# Altium PCB REIS_PCB.PcbDoc
Units mm, origin at the board's own origin, x right, y up, seen from the top; angles counter-clockwise.
Board outline 74.05 x 42.5 mm, 2 copper layers (Top Layer, Bottom Layer); 30 components, 27 nets, 173 pads, 6 vias.
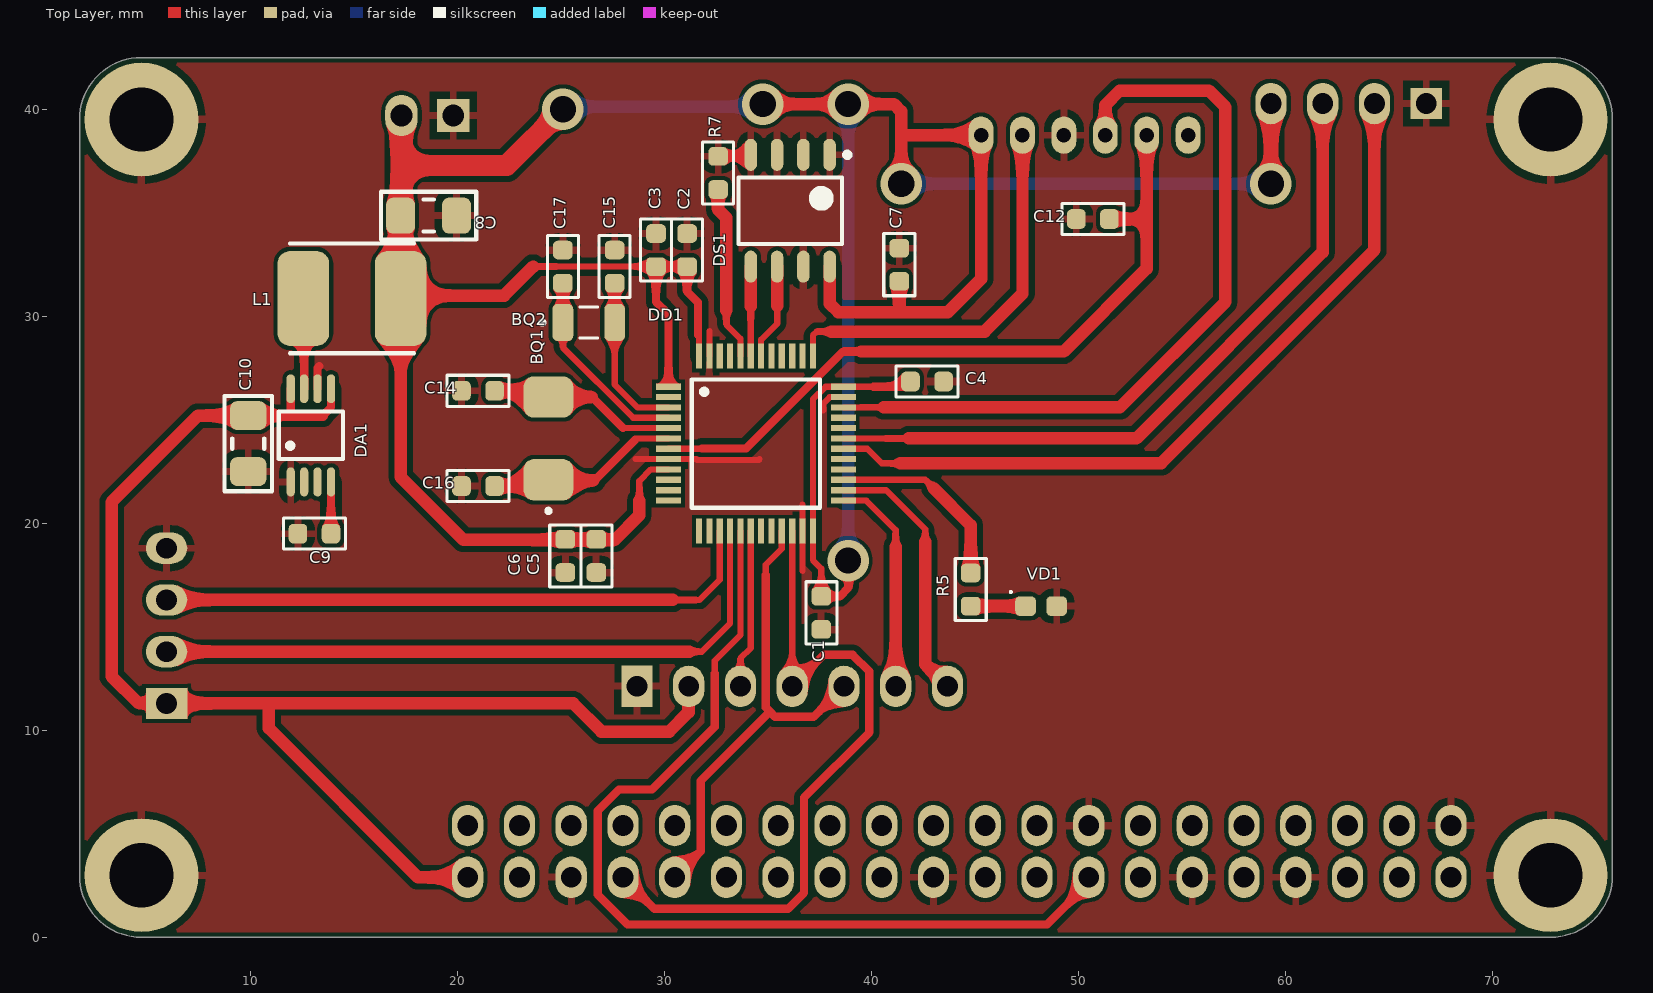
[diagram p0: Top Layer view]
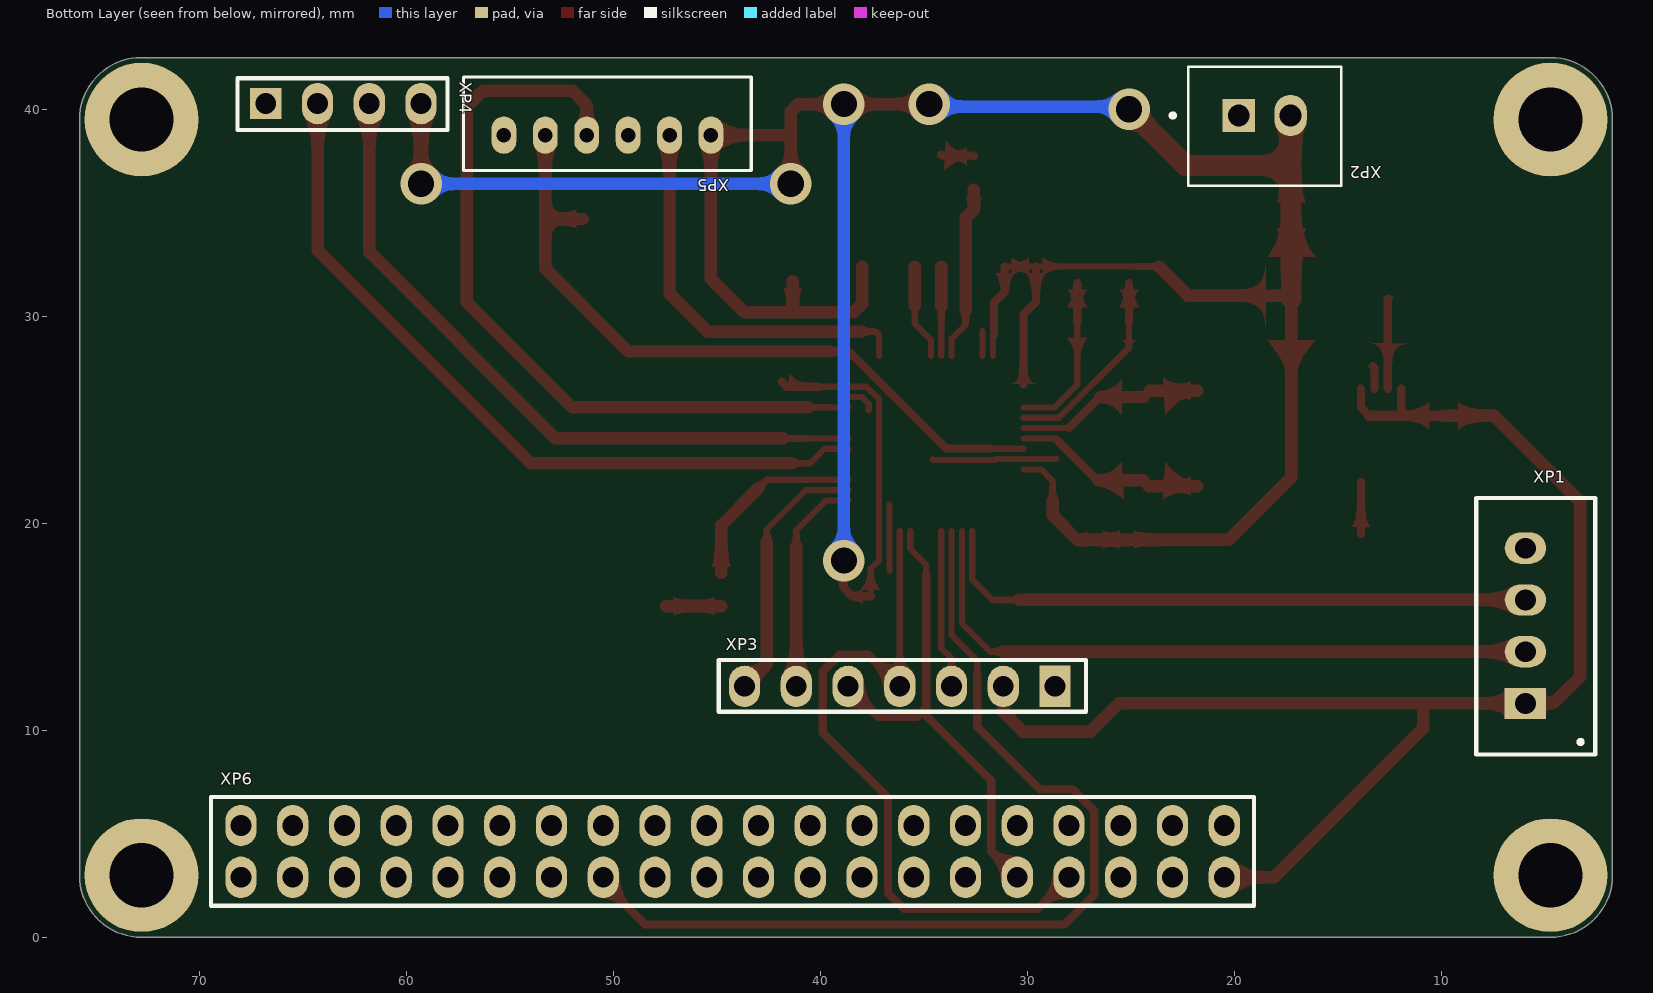
[diagram p1: Bottom Layer view, seen from below]

## Layer stack, top to bottom
Top Solder: solder mask 0.0102, Solder Resist, Dk 3.5
Top Layer: signal copper 0.0356
Dielectric 1: dielectric 0.32, FR-4, Dk 4.8
Bottom Layer: signal copper 0.0356
Bottom Solder: solder mask 0.0102, Solder Resist, Dk 3.5

## Board outline
1.75,3 1.75,39.5 cw(c4.75,39.5) 4.75,42.5 72.8,42.5 cw(c72.8,39.5) 75.8,39.5 75.8,3 cw(c72.8,3) 72.8,0 4.75,0 cw(c4.75,3)

## Design rules (kind name [scope] priority, off if disabled: settings)
AcuteAngle [All] p1: minimum=3.50000000000000E+0001 checktracksonly=FALSE
BoardOutlineClearance "BoardOutlineClearance 1" [All] p1: gap=0.25 ignorepadtopadclearanceinfootprint=FALSE except(0: Arc-SplitContinuation Track-SplitContinuation SMDPad-SplitContinuation THPad-SplitContinuation Via-SplitContinuation Fill-SplitContinuation Poly-SplitContinuation Region-SplitContinuation Text-SplitContinuation) // Milling
BoardOutlineClearance "BoardOutlineClearance 2" [All] p2: gap=0.4 ignorepadtopadclearanceinfootprint=FALSE except(0: Arc-SplitContinuation Track-SplitContinuation SMDPad-SplitContinuation THPad-SplitContinuation Via-SplitContinuation Fill-SplitContinuation Poly-SplitContinuation Region-SplitContinuation Text-SplitContinuation) // V-Cut
Clearance "Clearance 3 Oz" [All] p1 off: gap=0.35 ignorepadtopadclearanceinfootprint=FALSE except(0.25: Arc-Hole Track-Hole SMDPad-Hole THPad-Hole Via-Hole Fill-Hole Poly-Hole Region-Hole Text-Hole)
Clearance "Clearance 2 Oz" [All] p2 off: gap=0.3 ignorepadtopadclearanceinfootprint=TRUE except(0.25: Arc-Hole Track-Hole SMDPad-Hole THPad-Hole Via-Hole Fill-Hole Poly-Hole Region-Hole Text-Hole)
Clearance "Clearance-1 1 Oz" [All] p3: gap=0.2 ignorepadtopadclearanceinfootprint=TRUE except(0.25: Arc-Hole Track-Hole SMDPad-Hole THPad-Hole Via-Hole Fill-Hole Poly-Hole Region-Hole Text-Hole; 0.3: Arc-Fill Arc-Poly Arc-Region Track-Fill Track-Poly Track-Region) // Standart
Clearance "Clearance-2 1 Oz" [All] p4 off: gap=0.15 ignorepadtopadclearanceinfootprint=FALSE except(0.2: Arc-Fill Arc-Poly Track-Fill Track-Poly SMDPad-Fill SMDPad-Poly THPad-Fill THPad-Poly Via-Fill Via-Poly Fill-Fill Fill-Poly Poly-Poly; 0.25: Arc-Hole Track-Hole SMDPad-Hole THPad-Hole Via-Hole Fill-Hole Poly-Hole Region-Hole Text-Hole) // Advance
Clearance "Clearance-1 1/2 Oz" [All] p5 off: gap=0.125 ignorepadtopadclearanceinfootprint=FALSE except(0.2: Arc-Fill Arc-Poly Track-Fill Track-Poly SMDPad-SMDPad SMDPad-Fill SMDPad-Poly THPad-Fill THPad-Poly Via-Fill Via-Poly Fill-Fill Fill-Poly Poly-Poly Poly-Region Poly-Text; 0.25: Arc-Hole Track-Hole SMDPad-Hole THPad-Hole Via-Hole Fill-Hole Poly-Hole Region-Hole Text-Hole) // Standart
Clearance "Clearance-2 1/2 Oz" [All] p6 off: gap=0.1 ignorepadtopadclearanceinfootprint=FALSE except(0.15: Arc-Fill Arc-Poly Track-Fill Track-Poly SMDPad-SMDPad SMDPad-Fill SMDPad-Poly THPad-Fill THPad-Poly Via-Fill Via-Poly Fill-Fill Fill-Poly Poly-Poly Poly-Region Poly-Text; 0.25: Arc-Hole Track-Hole SMDPad-Hole THPad-Hole Via-Hole Fill-Hole Poly-Hole Region-Hole Text-Hole) // Advance
DiffPairsRouting "DiffPairsRouting 1 Oz" [All] p1: maxlimit=0.254 minlimit=0.2 mostfreqgap=0.254 toplayer_minwidth=0.2 toplayer_maxwidth=0.381 toplayer_prefwidth=0.381 bottomlayer_minwidth=0.2 bottomlayer_maxwidth=0.381 bottomlayer_prefwidth=0.381 maxuncoupledlength=12.7
DiffPairsRouting "DiffPairsRouting 1/2 Oz" [All] p2: maxlimit=0.254 minlimit=0.1 mostfreqgap=0.254 toplayer_minwidth=0.1 toplayer_maxwidth=0.381 toplayer_prefwidth=0.381 bottomlayer_minwidth=0.1 bottomlayer_maxwidth=0.381 bottomlayer_prefwidth=0.381 maxuncoupledlength=12.7
HoleSize "Minimum HoleSize" [IsPad] p1: absolutevalues=TRUE maxlimit=5.9 minlimit=0.6 maxpercent=80.000 minpercent=20.000
HoleSize "Minimum HoleSize VIA 1" [IsVia] p2: absolutevalues=TRUE maxlimit=5.9 minlimit=0.3 maxpercent=80.000 minpercent=20.000 // Standart
HoleSize "Minimum HoleSize VIA 2" [IsVia] p3: absolutevalues=TRUE maxlimit=5.9 minlimit=0.2 maxpercent=80.000 minpercent=20.000 // Advance
HoleToHoleClearance Hole2HoleClearance [All] p1: gap=0.25 allowstackedmicrovias=FALSE
MinimumAnnularRing "Minimum AR VIA Standart" [IsVia] p1: minimumring=0.15
MinimumAnnularRing "Minimum AR PAD Standart" [IsPAD] p2: minimumring=0.2
MinimumAnnularRing "Minimum AR VIA Advance" [IsVia] p3: minimumring=0.1
MinimumAnnularRing "Minimum AR PAD Advance" [IsPAD] p4: minimumring=0.15
MinimumSolderMaskSliver "SolderMask Bridge Standart" [All] p1 off: minsoldermaskwidth=0.15 // All Masks
MinimumSolderMaskSliver "SolderMask Bridge Advance" [All] p2: minsoldermaskwidth=0.1 // Mask LDI
PlaneClearance "PlaneClearance 3 Oz" [All] p1: clearance=0.35
PlaneClearance "PlaneClearance 2 Oz" [All] p2: clearance=0.3
PlaneClearance "PlaneClearance 1 Oz" [All] p3: clearance=0.2
PlaneClearance "PlaneClearance-1 1/2 Oz" [All] p4: clearance=0.2 // Standart
PlaneClearance "PlaneClearance-2 1/2 Oz" [All] p5: clearance=0.15 // Advance
PlaneConnect "TermalConnect 3 Oz" [All] p1: planeconnectstyle=Relief reliefexpansion=0.2 reliefentries=4 reliefconductorwidth=0.35 reliefairgap=0.35 // Standart
PlaneConnect "TermalConnect 2 Oz" [All] p2: planeconnectstyle=Relief reliefexpansion=0.2 reliefentries=4 reliefconductorwidth=0.3 reliefairgap=0.3 // Standart
PlaneConnect "TermalConnect-1 1 Oz" [All] p3: planeconnectstyle=Relief reliefexpansion=0.2 reliefentries=4 reliefconductorwidth=0.2 reliefairgap=0.2 // Standart
PlaneConnect "TermalConnect-2 1 Oz" [All] p4: pad.planeconnectstyle=Relief pad.reliefexpansion=0.15 pad.reliefentries=4 pad.reliefconductorwidth=0.2 pad.reliefairgap=0.2 via.planeconnectstyle=Direct via.reliefexpansion=0.15 via.reliefentries=4 via.reliefconductorwidth=0.15 via.reliefairgap=0.15 // Advance
PlaneConnect "TermalConnect-1 1/2 Oz" [All] p5: planeconnectstyle=Relief reliefexpansion=0.2 reliefentries=4 reliefconductorwidth=0.2 reliefairgap=0.2 // Standart
PlaneConnect "TermalConnect-2 1/2 Oz" [All] p6: pad.planeconnectstyle=Relief pad.reliefexpansion=0.15 pad.reliefentries=4 pad.reliefconductorwidth=0.15 pad.reliefairgap=0.15 via.planeconnectstyle=Direct via.reliefexpansion=0.15 via.reliefentries=4 via.reliefconductorwidth=0.15 via.reliefairgap=0.15 // Advance
PolygonConnect "PolygonConnect 3 Oz" [All] p1: thpad.connectstyle=Relief thpad.reliefconductorwidth=0.35 thpad.reliefentries=4 thpad.polygonreliefangle="90 Angle" thpad.airgapwidth=0.35 smdpad.connectstyle=Relief smdpad.reliefconductorwidth=0.35 smdpad.reliefentries=4 smdpad.polygonreliefangle="90 Angle" smdpad.airgapwidth=0.35 via.connectstyle=Direct via.reliefconductorwidth=0.254 via.reliefentries=4 via.polygonreliefangle="90 Angle" via.airgapwidth=0.254
PolygonConnect "PolygonConnect 2 Oz" [All] p2: thpad.connectstyle=Relief thpad.reliefconductorwidth=0.3 thpad.reliefentries=4 thpad.polygonreliefangle="90 Angle" thpad.airgapwidth=0.3 smdpad.connectstyle=Relief smdpad.reliefconductorwidth=0.3 smdpad.reliefentries=4 smdpad.polygonreliefangle="90 Angle" smdpad.airgapwidth=0.3 via.connectstyle=Direct via.reliefconductorwidth=0.254 via.reliefentries=4 via.polygonreliefangle="90 Angle" via.airgapwidth=0.254
PolygonConnect "PolygonConnect-1 1 Oz" [All] p3: thpad.connectstyle=Relief thpad.reliefconductorwidth=0.2 thpad.reliefentries=4 thpad.polygonreliefangle="90 Angle" thpad.airgapwidth=0.2 smdpad.connectstyle=Relief smdpad.reliefconductorwidth=0.2 smdpad.reliefentries=4 smdpad.polygonreliefangle="90 Angle" smdpad.airgapwidth=0.2 via.connectstyle=Direct via.reliefconductorwidth=0.254 via.reliefentries=4 via.polygonreliefangle="90 Angle" via.airgapwidth=0.254 // Standart
PolygonConnect "PolygonConnect-2 1 Oz" [All] p4: thpad.connectstyle=Relief thpad.reliefconductorwidth=0.15 thpad.reliefentries=4 thpad.polygonreliefangle="90 Angle" thpad.airgapwidth=0.15 smdpad.connectstyle=Relief smdpad.reliefconductorwidth=0.15 smdpad.reliefentries=4 smdpad.polygonreliefangle="90 Angle" smdpad.airgapwidth=0.15 via.connectstyle=Direct via.reliefconductorwidth=0.254 via.reliefentries=4 via.polygonreliefangle="90 Angle" via.airgapwidth=0.254 // Advance
PolygonConnect "PolygonConnect-1 1/2 Oz" [All] p5: thpad.connectstyle=Relief thpad.reliefconductorwidth=0.15 thpad.reliefentries=4 thpad.polygonreliefangle="90 Angle" thpad.airgapwidth=0.2 smdpad.connectstyle=Relief smdpad.reliefconductorwidth=0.2 smdpad.reliefentries=4 smdpad.polygonreliefangle="90 Angle" smdpad.airgapwidth=0.2 via.connectstyle=Direct via.reliefconductorwidth=0.254 via.reliefentries=4 via.polygonreliefangle="90 Angle" via.airgapwidth=0.254 // Standart
PolygonConnect "PolygonConnect-2 1/2 Oz" [All] p6: thpad.connectstyle=Relief thpad.reliefconductorwidth=0.125 thpad.reliefentries=4 thpad.polygonreliefangle="90 Angle" thpad.airgapwidth=0.15 smdpad.connectstyle=Relief smdpad.reliefconductorwidth=0.125 smdpad.reliefentries=4 smdpad.polygonreliefangle="90 Angle" smdpad.airgapwidth=0.15 via.connectstyle=Direct via.reliefconductorwidth=0.254 via.reliefentries=4 via.polygonreliefangle="90 Angle" via.airgapwidth=0.254 // Advance
RoutingCorners [All] p1 off: cornerstyle=45-Degree minsetback=2.54 maxsetback=2.54
RoutingVias [All] p1: holewidth=0.3 width=0.6 viastyle="Through Hole" minholewidth=0.2 minwidth=0.4 maxholewidth=5.9 maxwidth=6.4
SilkToSilkClearance Silk2SilkClearance [All] p1 off: silktosilkclearance=0.15
SilkToSolderMaskClearance Silk2SolderMaskClearance [IsPad] p1 off: minsilkscreentomaskgap=0.15 clearancetoexposedcopper=TRUE
SolderMaskExpansion SolderMaskExpansion-1 [All] p1: expansion=0.05 istentingtop=FALSE // Standart
SolderMaskExpansion "SolderMaskExpansion LDI" [All] p2: expansion=0.025 istentingtop=FALSE // Advance
UnRoutedNet [All] p1: checkbadconnections=TRUE
Width "Width 3 Oz" [All] p1 off: maxlimit=10 minlimit=0.35 preferedwidth=0.4 checkconnectedcopper=TRUE
Width "Width 2 Oz" [All] p2: maxlimit=1 minlimit=0.2 preferedwidth=0.3 minimp=50.000000 maximp=50.000000 favimp=50.000000 checkconnectedcopper=TRUE
Width "Width 1 Oz" [All] p3 off: maxlimit=10 minlimit=0.15 preferedwidth=0.2 checkconnectedcopper=TRUE
Width "Width 1/2 Oz" [All] p4 off: maxlimit=10 minlimit=0.1 preferedwidth=0.125 checkconnectedcopper=TRUE
20 further rules are at their usual default settings.

## Classes and differential pairs
component class REIS_PCB: BQ1 BQ2 C1 C2 C3 C4 C5 C6 C7 C8 C9 C10 C12 C14 C15 C16 C17 DA1 DD1 DS1 L1 R7 XP1 XP2 XP3 XP4 XP5 XP6

## Components (designator, comment, footprint, x,y, rotation, side; value= is the part's Value field where it differs from the comment)
BQ1 "NX5032GA-8MHz" NX5032GA-8MHz 24.4,24.1 r90 top
BQ2 "NX3215SA-32.768K" NX3215SA-32.768kHz 26.35,29.7 r0 top
C1 "GRM188R71H104JA93D" 0603 37.584,15.675 r90 top
C2 "GRM188R71H104JA93D" 0603 31.1,33.2 r270 top
C3 "GRM188R71H104JA93D" 0603 29.6,33.2 r270 top
C4 "GRM188R71H104JA93D" 0603 42.689,26.85 r180 top
C5 "GRM188R71E105KA12D" 0603 26.716,18.425 r90 top
C6 "GRM188R71H104JA93D" 0603 25.216,18.425 r90 top
C7 "GRM188R71H104JA93D" 0603 41.351,32.492 r270 top
C8 "GRM319R61E475K" 1206 18.613,34.863 r180 top
C9 "GRM188R71H104JA93D" 0603 13.1,19.5 r0 top
C10 "GRM319R61E475K" 1206 9.9,23.85 r90 top
C12 "GRM188R71H104JA93D" 0603 50.7,34.7 r0 top
C14 "CC0603DRNPO9BN8R0" 0603 21,26.4 r0 top
C15 "CC0603CRNPO9BN7R0" 0603 27.6,32.4 r270 top
C16 "CC0603DRNPO9BN8R0" 0603 21,21.8 r0 top
C17 "CC0603CRNPO9BN7R0" 0603 25.1,32.4 r270 top
DA1 "L6920DCTR 5V CONVERTER" MSOP 12.925,24.25 r90 top
DD1 "STM32 MCU" LQFP48 34.425,23.85 r0 top
DS1 "24C01C EEPROM" SOIC8 36.08,35.1 r270 top
L1 "LQH55DN100M" 2220 14.912,30.863 r180 top
R5 "RC0603JR-0762RL" 0603 44.8,16.8 r90 top
R7 "RC0603FR-0710KL" 0603 32.6,36.925 r270 top
VD1 "GNL-0603EC" 0603LED 48.2,16 r0 top
XP1 "B4B-XH-A" B4B-XH-A 5.955,16.3 r270 bottom
XP2 "B2B-XH-A" B2B-XH-A 17.3,39.7 r0 bottom
XP3 "DS1023-1x7" DS1023-1x7 37.425,12.65 r180 bottom
XP4 "DS1021-1x4" DS1021-1x4 63.05,39.75 r0 bottom
XP5 "B6B-PH-K-S" B6B-PH-K-S 51.3,38.75 r180 bottom
XP6 "DS1021-2x20" DS1021-2x20 43,2.9 r0 bottom

## Footprints (in the part's own frame and the unit in brackets; to place one, negate y for a bottom-side part, rotate by r counter-clockwise, add the part's x,y. Pads: shape width x height; smd on the part's side, far side on the other; paste and mask are expansions set on the pad)
0603 [mm] "Chip Capacitor, 2-Leads, Body 1,60x0,80mm, IPC Medium Density"
  rrect50% 0.9x0.95 smd: 1(-0.8,0) 2(0.8,0)
  silkscreen extent -1.5,-0.75 1.5,0.75, body extent -0.85,-0.45 0.85,0.45, height 0.55
0603LED [mm]
  rrect50% 1x0.95 smd: 1(-0.75,0) 2(0.75,0)
  silkscreen extent -1.51,0.64 -1.41,0.74, body extent -0.8,-0.4 0.8,0.4, height 0.55
1206 [mm]
  rrect50% 1.4x1.75 smd: 1(-1.35,0) 2(1.35,0)
  silkscreen extent -2.3,-1.15 2.3,1.15, body extent -1.65,-0.85 1.65,0.85, height 1.6
2220 [mm]
  rrect50% 2.5x4.6 smd: 1(-2.35,0) 2(2.35,0)
  silkscreen extent -3,-2.65 3,2.65, body extent -2.95,-2.5 2.95,2.5, height 5.1
B2B-XH-A [mm]
  oval 1.575x2 hole 1.05: 1(0,0)
  rect 1.575x1.575 / inner round 1.575 / far side rect 1.575x1.575 hole 1.05: 2(2.5,0)
  silkscreen extent -2.45,-2.35 5.79,3.4, body extent -2.47,-2.33 4.93,3.42, height 7
B4B-XH-A [mm]
  rect 1.508x2 / inner round 1.508 / far side rect 1.508x2 hole 1: 1(5,0)
  oval 1.508x2 hole 1: 2(2.5,0) 3(0,0) 4(-2.5,0)
  silkscreen extent -4.92,-2.38 7.48,3.37, body extent -4.95,-2.35 7.45,3.4, height 7
B6B-PH-K-S [mm]
  oval 1.2x1.8 hole 0.7: 1(6,0) 2(4,0) 3(2,0) 4(0,0) 5(-2,0) 6(-4,0)
  silkscreen extent -5.95,-1.7 7.95,2.8, body extent -5.95,-1.7 7.95,2.8, height 6
DS1021-1x4 [mm]
  oval 1.508x2 hole 1: 1(-3.75,-0.525) 2(-1.25,-0.525) 3(1.25,-0.525)
  rect 1.508x1.508 / inner round 1.508 / far side rect 1.508x1.508 hole 1: 4(3.75,-0.525)
  silkscreen extent -5.02,-1.75 5.13,0.75, body extent -5.02,-1.8 5.14,0.74, height 8.6
DS1021-2x20 [mm]
  oval 1.508x2 hole 1: 1(-22.5,-2.5) 2(-22.5,0) 3(-20,-2.5) 4(-20,0) 5(-17.5,-2.5) 6(-17.5,0) 7(-15,-2.5) 8(-15,0) 9(-12.5,-2.5) 10(-12.5,0) 11(-10,-2.5) 12(-10,0) 13(-7.5,-2.5) 14(-7.5,0) 15(-5,-2.5) 16(-5,0) 17(-2.5,-2.5) 18(-2.5,0) 19(0,-2.5) 20(0,0) 21(2.5,-2.5) 22(2.5,0) 23(5,-2.5) 24(5,0) 25(7.5,-2.5) 26(7.5,0) 27(10,-2.5) 28(10,0) 29(12.5,-2.5) 30(12.5,0) 31(15,-2.5) 32(15,0) 33(17.5,-2.5) 34(17.5,0) 35(20,-2.5) 36(20,0) 37(22.5,-2.5) 38(22.5,0) 39(25,-2.5) 40(25,0)
  silkscreen extent -23.93,-3.88 26.45,1.38, body extent -23.82,-3.77 26.34,1.27, height 8.6
DS1023-1x7 [mm]
  oval 1.508x2 hole 1: 1(-6.25,-0.525) 2(-3.75,-0.525) 3(-1.25,-0.525) 4(1.25,-0.525) 5(3.75,-0.525) 6(6.25,-0.525)
  rect 1.508x2 / inner round 1.508 / far side rect 1.508x2 hole 1: 7(8.75,-0.525)
  silkscreen extent -7.5,-1.75 10.25,0.75, body extent -7.52,-1.79 10.26,0.75, height 8.5
LQFP48 [mm]
  rect 1.2x0.3 smd: 1(-4.225,2.75) 2(-4.225,2.25) 3(-4.225,1.75) 4(-4.225,1.25) 5(-4.225,0.75) 6(-4.225,0.25) 7(-4.225,-0.25) 8(-4.225,-0.75) 9(-4.225,-1.25) 10(-4.225,-1.75) 11(-4.225,-2.25) 12(-4.225,-2.75) 25(4.225,-2.75) 26(4.225,-2.25) 27(4.225,-1.75) 28(4.225,-1.25) 29(4.225,-0.75) 30(4.225,-0.25) 31(4.225,0.25) 32(4.225,0.75) 33(4.225,1.25) 34(4.225,1.75) 35(4.225,2.25) 36(4.225,2.75)
  rect 0.3x1.2 smd: 13(-2.75,-4.225) 14(-2.25,-4.225) 15(-1.75,-4.225) 16(-1.25,-4.225) 17(-0.75,-4.225) 18(-0.25,-4.225) 19(0.25,-4.225) 20(0.75,-4.225) 21(1.25,-4.225) 22(1.75,-4.225) 23(2.25,-4.225) 24(2.75,-4.225) 37(2.75,4.225) 38(2.25,4.225) 39(1.75,4.225) 40(1.25,4.225) 41(0.75,4.225) 42(0.25,4.225) 43(-0.25,4.225) 44(-0.75,4.225) 45(-1.25,4.225) 46(-1.75,4.225) 47(-2.25,4.225) 48(-2.75,4.225)
  silkscreen extent -3.1,-3.1 3.1,3.1, body extent -4.5,-4.5 4.5,4.5, height 1.6
MSOP [mm]
  oval 1.4x0.4 smd: 1(-2.25,0.975) 2(-2.25,0.325) 3(-2.25,-0.325) 4(-2.25,-0.975) 5(2.25,-0.975) 6(2.25,-0.325) 7(2.25,0.325) 8(2.25,0.975)
  silkscreen extent -1.15,-1.55 1.15,1.55, body extent -2.45,-1.55 2.45,1.55, height 1.1
NX3215SA-32.768kHz [mm]
  rrect50% 1x1.8 smd: 1(-1.25,0) 2(1.25,0)
  silkscreen extent -2.35,-0.75 0.43,0.75, body extent -1.6,-0.75 1.6,0.75, height 0.9
NX5032GA-8MHz [mm]
  rrect50% 2x2.4 smd: 1(-2,0) 2(2,0)
  silkscreen extent -3.6,-0.1 -3.4,0.1, body extent -2.5,-1.6 2.5,1.6, height 1.3
SOIC8 [mm]
  oval 1.55x0.6 smd: 1(-2.7,1.905) 2(-2.7,0.635) 3(-2.7,-0.635) 4(-2.7,-1.905) 5(2.7,-1.905) 6(2.7,-0.635) 7(2.7,0.635) 8(2.7,1.905)
  silkscreen extent -2.82,-2.5 1.6,2.88, body extent -3,-2.5 3,2.5, height 1.75

## Part data
BQ1: "8MHz resonator", Frequency=8Mhz, Manufacturer=NDK, Package=SMD, Family="Кварцевый резонатор", Model=NX5032GA-8MHz, Pins=2
BQ2: "32.768kHz resonator", Frequency=32.768kHz, Manufacturer=NDK, Package=SMD, Family="Кварцевый резонатор", Model=NX3215SA-32.768K, Pins=4
C1 C2 C3 C4 C6 C7 C9 C12: "0.1uF capacitor", Capacity=0.1uF, Manufacturer=Murata, Package=0603, Voltage=50V, Family=Конденсатор, Model=GRM188R71H104JA93D, Pins=2
C5: "1uF capacitor", Capacity=1uF, Manufacturer=Murata, Package=0603, Voltage=25V, Family=Конденсатор, Model=GRM188R71E105KA12D, Pins=2
C8 C10: "47uF capacitor", Capacity=47uF, Manufacturer=Murata, Package=1206, Voltage=25V, Family=Конденсатор, Model=GRM319R61E475K, Pins=2
C14 C16: "8pF capacitor", Capacity=8pF, Manufacturer=Yageo, Package=0603, Voltage=50V, Family=Конденсатор, Model=CC0603DRNPO9BN8R0, Pins=2
C15 C17: "7pF capacitor", Capacity=7pF, Manufacturer=Yageo, Package=0603, Voltage=50V, Family=Конденсатор, Model=CC0603CRNPO9BN7R0, Pins=2
DA1: library part L6920DCTR, "Synchronous rectifier step up converter", Manufacturer=STMicroelectronics, Package=MSOP, Family=Микросхема, Model=L6920DCTR, Pins=8
DD1: library part STM32L051C8T6, "MCU STM32", Manufacturer=STMicroelectronics, Package=LQFP48, Family=Микросхема, Model=STM32L051C8T6, Pins=48
DS1: library part 24C01C-SSHM-T, "Serial EEPROM", Manufacturer=Atmel, Package=SOIC8, Family=Микросхема, Model=24C01C-SSHM-T, Pins=8
L1: "10 uH inductor", Inductance=10uH, Manufacturer=Murata, Package=2220, Family="Катушка индуктивности", Model=LQH55DN100M, Pins=2
R5: "62Ohm resistor", Manufacturer=Тайвань, Package=0603, Resistance=62, Model=RC0603JR-0762RL, Pins=2
R7: "10k resistor", Manufacturer=-, Package=0603, Resistance=10k, Family=Резистор, Model=RC0603FR-0710KL, Pins=2
VD1: "Red light-emitting diode", Manufacturer=G-nor, Package=0603, Family=Диод, Model=GNL-0603EC, Pins=2
XP1: "Connector 4pin", Manufacturer=JST, Package=Conn, Family=Разъём, Model=B4B-XH-A, Parameter 1=5V, Parameter 2=TRIG, Parameter 3=ECHO, Parameter 4=GND, Pins=4
XP2: "Power connector", Manufacturer=JST, Package=Conn, Family=Разъём, Model=B2B-XH-A, Parameter 1=3V2, Parameter 2=GND, Pins=2
XP3: "Connector E032 to PBS7_DS1023-1x7", Manufacturer=Connfly, Package=Conn, Family=Разъём, Model=DS1023-1x7, Parameter 1=M0, Parameter 2=M1, Parameter 3=RXD, Parameter 4=TXD, Parameter 5=AUX, Parameter 6=5V, Parameter 7=GND, Pins=7
XP4: "USART connector PLS4_DS1021-1x4", Manufacturer=Connfly, Package=Conn, Family=Разъём, Model=DS1021-1x4, Parameter 1=3V2, Parameter 2=DEBUG_RX, Parameter 3=DEBUG_TX, Parameter 4=GND, Pins=4
XP5: "SWDIO connector", Manufacturer=JST, Package=Conn, Family=Разъём, Model=B6B-PH-K-S, Parameter 1=3V2, Parameter 2=SWCLK, Parameter 3=GND, Parameter 4=SWDIO, Parameter 5=NRST, Parameter 6=SWO, Pins=6
XP6: "Connector SIM7000E", Manufacturer=Connfly, Package=Conn, Family=Разъём, Model=DS1021-2x20, Parameter 1=5V, Parameter 2=DTR, Parameter 3=TXD, Parameter 4=RXD, Parameter 5=GND, Parameter 7=RESERVED, Pins=40

## Free pads (board coordinates)
  round 5.5 hole 3.1: 6(4.75,39.5) 7(4.75,3) 8(72.8,3) 9(72.8,39.5)

## Via types
v1: diameter 2, hole 1.27, Top Layer to Bottom Layer, 6 vias

## Nets (pads, with @x,y where several pads share a name; then routed paths per layer and width w, separated by ;. In a path a pad name is that pad's centre, name@x,y a point inside that pad or via, vN(x,y) a via of type N, cw(c..) or ccw(c..) an arc to the next point about the centre after c; other vN are vias at no path point)
3V2: C1.2 C2.2 C3.2 C4.2 C5.2 C6.2 C7.2 C8.2 DD1.1 DD1.9 DD1.24 DD1.36 DD1.48 DS1.8 L1.1 XP2.1 XP4.1 XP5.1 | length 172
  Top Layer w0.3: L1.1 L1.1@17.4,31 ; 23.661,32.4 28.088,32.4 C3.2 C2.2 ; 28.791,21.091 28.791,22.041 29.35,22.6 DD1.9 ; DD1.48 31.675,29.1 ; C1.2 37.584,17.816 37.175,18.225 DD1.24 37.175,25.989 37.786,26.6 DD1.36 40.1,26.6 ; v1(38.875,18.2) v1@38.9,18.175
  Top Layer w0.4: C3.2 29.6,30.7 30.2,30.1 DD1.1@30.2,26.7 ; C2.2 31.1,31.2 31.625,30.675 31.625,29.1 ; C1.2 38.475,16.475 38.9,16.9 v1@38.9,18.175 ; 40.1,26.6 41.641,26.6 41.889,26.848 C4.2
  Top Layer w0.6: L1.1 17.263,22.238 20.3,19.2 C5.2@26.716,19.2 ; L1.1@17.4,31 22.261,31 23.661,32.4 ; C5.2 26.738,19.204 27.604,19.204 28.791,20.391 28.791,21.091 ; v1(34.75,40.25) 39.25,40.25 41.091,40.25 41.442,39.899 41.442,38.8 ; DS1.8 37.985,30.615 38.4,30.2 41.3,30.2 ; C7.2 41.351,30.251 41.3,30.2 ; v1@41.552,36.51 v1(41.442,36.4) 41.442,38.8 ; 41.3,30.2 43.7,30.2 45.3,31.8 XP5.1 41.492,38.75 41.442,38.8
  Top Layer w0.7: v1(59.3,36.4) XP4.1
  Top Layer w1: L1.1 C8.2 17.281,34.881 17.281,37.281 ; XP2.1 17.281,39.681 17.281,37.281 ; v1(25.1,40) 22.381,37.281 17.281,37.281
  Bottom Layer w0.6: v1(25.1,40) 25.225,40.125 34.625,40.125 v1(34.75,40.25) ; v1(38.875,18.2) 38.875,39.496 39.25,39.871 v1@39.25,40.25 ; v1(41.442,36.4) v1(59.3,36.4)
  other v1: 38.875,40.25
5V: C10.2 DA1.5 DA1.8 XP1.1 XP3.6 XP6.2 | length 67.3
  Top Layer w0.4: 11.9,25.2 11.95,25.25 DA1.8 ; 13.5,25.2 13.9,25.6 DA1.5
  Top Layer w0.5: C10.2 11.9,25.2 13.5,25.2
  Top Layer w0.6: C10.2 7.475,25.2 3.3,21.025 3.3,12.607 4.587,11.32 5.936,11.32 XP1.1 25.6,11.3 26.962,9.938 30.238,9.938 31.175,10.875 XP3.6 ; 10.9,11.1 10.9,10.1 18.1,2.9 XP6.2
COMM_UART_RX: DD1.22 XP3.4 XP6.8 | length 33.9
  Top Layer w0.3: XP3.4 DD1.22
  Top Layer w0.4: XP6.8 29.525,1.375 35.975,1.375 36.751,2.151 36.751,6.751 39.901,9.901 39.901,12.849 39.1,13.65 37.7,13.65 XP3.4
COMM_UART_TX: DD1.21 XP3.3 XP6.10 | length 23.3
  Top Layer w0.3: 34.9,17.5 34.9,18 35.675,18.775 DD1.21
  Top Layer w0.4: XP6.10 31.753,4.153 31.753,7.553 35.1,10.9 ; 34.9,17.5 34.9,11.1 35.1,10.9 ; XP3.3 37.2,10.65 35.35,10.65 35.1,10.9
DEBUG_UART_RX: DD1.31 XP4.2 | length 34.1
  Top Layer w0.3: DD1.31 41.8,24.1
  Top Layer w0.6: 41.8,24.1 52.8,24.1 61.8,33.1 XP4.2
DEBUG_UART_TX: DD1.30 XP4.3 | length 37.3
  Top Layer w0.3: DD1.30 39.8,23.6 40.5,22.9 41.4,22.9
  Top Layer w0.6: 41.4,22.9 54,22.9 64.3,33.2 XP4.3
GND: C1.1 C2.1 C3.1 C4.1 C5.1 C6.1 C7.1 C8.1 C9.1 C10.1 C12.1 C14.1 C15.1 C16.1 C17.1 DA1.1 DA1.6 DD1.8 DD1.23 DD1.35 DD1.47 DS1.1 DS1.2 DS1.3 DS1.4 DS1.7 pad.6 pad.7 pad.8 pad.9 R7.1 VD1.2 XP1.4 XP2.2 XP3.7 XP4.4 XP5.3 XP6.6 XP6.20 XP6.25 XP6.30 XP6.34 XP6.39 | length 14.6
  Top Layer w0.3: 28.6,23.1 31.549,23.1 31.586,23.063 34.563,23.063 34.6,23.1 ; DD1.47 32.175,29.275 ; 36.675,17.7 DD1.23 36.675,20.9 ; 37.675,25.459 37.675,25.782 37.993,26.1 DD1.35
  Top Layer w0.4: DA1.6 13.25,27.505 13.332,27.587 ; R7.1 32.637,37.763 34.138,37.763 DS1.4
I2C_EEPROM_SCL: DD1.42 DS1.6 | length 4.6
  Top Layer w0.3: DD1.42 34.675,28.875 35.449,29.649 35.449,30.499 35.445,30.504
  Top Layer w0.6: 35.445,30.504 DS1.6
I2C_EEPROM_SDA: DD1.43 DS1.5 | length 4.3
  Top Layer w0.3: DD1.43 34.175,30.475
  Top Layer w0.6: 34.175,30.475 DS1.5
inLORA_AUX: DD1.18 XP3.5 | length 7.7
  Top Layer w0.3: XP3.5 33.675,13.475 34.175,13.975 DD1.18
inUDS_ECHO: DD1.15 XP1.3 | length 29.5
  Top Layer w0.3: 30.4,16.3 31.7,16.3 32.675,17.275 DD1.15
  Top Layer w0.6: XP1.3 11.1,16.3 30.4,16.3
NetBQ1_1: BQ1.1 C16.2 DD1.6 | length 9.4
  Top Layer w0.3: 28.6,24.05 28.65,24.1 DD1.6
  Top Layer w0.4: BQ1.1@24.151,21.8 BQ1.1@24.426,22.074 ; 26.574,22.074 26.624,22.074 28.6,24.05
  Top Layer w0.6: C16.2 BQ1.1@24.151,21.8 ; BQ1.1@24.426,22.074 26.574,22.074
NetBQ1_2: BQ1.2 C14.2 DD1.5 | length 9.1
  Top Layer w0.3: 28,24.6 DD1.5
  Top Layer w0.4: BQ1.2@24.1,26.4 BQ1.2 ; 26.5,26.1 28,24.6
  Top Layer w0.6: C14.2 BQ1.2@24.1,26.4 ; BQ1.2 26.5,26.1
NetBQ2_1: BQ2.1 C17.2 DD1.4 | length 9.6
  Top Layer w0.3: BQ2.1 25.1,28.493 28.493,25.1 DD1.4
  Top Layer w0.4: BQ2.1 C17.2
NetBQ2_2: BQ2.2 C15.2 DD1.3 | length 8
  Top Layer w0.3: BQ2.2 27.6,26.7 28.7,25.6 DD1.3
  Top Layer w0.4: BQ2.2 C15.2
NetC9_2: C9.2 DA1.4 | length 2.5
  Top Layer w0.4: C9.2 13.9,21.5 DA1.4
NetDA1_7: DA1.7 L1.2 | length 4.4
  Top Layer w0.4: L1.2 12.6,30.825 DA1.7
NetDD1_27: DD1.27 R5.2 | length 9.4
  Top Layer w0.3: DD1.27 42.6,22.1 43,21.7
  Top Layer w0.6: 43,21.7 44.8,19.9 R5.2
NetDD1_44: DD1.44 R7.2 | length 8.5
  Top Layer w0.3: 33,30.3 33,29.6 33.675,28.925 DD1.44
  Top Layer w0.6: R7.2 32.6,35.15 33,34.75 33,30.3
NetR5_1: R5.1 VD1.1 | length 2.7
  Top Layer w0.6: R5.1 44.975,16 46.175,16 VD1.1
NRST: C12.2 DD1.7 XP5.5 | length 35
  Top Layer w0.2: 31.8,23.6 31.813,23.613
  Top Layer w0.3: DD1.7 31.8,23.6
  Top Layer w0.4: 31.813,23.613 33.955,23.613 38.642,28.3 39.5,28.3
  Top Layer w0.6: 39.5,28.3 49.3,28.3 53.3,32.3 53.3,34.7 ; C12.2 53.3,34.7 ; XP5.5 53.3,34.7
OLORA_M0: DD1.26 XP3.1 | length 12.8
  Top Layer w0.3: DD1.26 40.712,21.6 42.6,19.712 42.6,19.1
  Top Layer w0.6: 42.6,19.1 42.6,13.2 XP3.1
OLORA_M1: DD1.25 XP3.2 | length 10.7
  Top Layer w0.3: DD1.25 39.75,21.1 41.175,19.675 41.175,18.875
  Top Layer w0.6: XP3.2 41.175,18.875
outGSM_DTR: DD1.17 XP6.26 | length 46.8
  Top Layer w0.3: 32.433,12.744 32.433,13.358 33.675,14.6 DD1.17
  Top Layer w0.4: 32.433,12.744 32.433,10.165 29.408,7.14 27.808,7.14 26.779,6.111 26.779,2.069 28.224,0.625 48.493,0.625 50.5,2.632 XP6.26
outUDS_TRIG: DD1.16 XP1.2 | length 32.2
  Top Layer w0.3: 31.2,13.8 31.812,13.8 33.175,15.163 DD1.16
  Top Layer w0.6: XP1.2 31.2,13.8
SYS_SWCLK: DD1.37 XP5.2 | length 19.6
  Top Layer w0.3: DD1.37 37.175,29.075 37.362,29.262 38.06,29.262
  Top Layer w0.6: 38.06,29.262 45.47,29.262 47.3,31.092 XP5.2
SYS_SWDIO: DD1.34 XP5.4 | length 37.8
  Top Layer w0.3: DD1.34 40.6,25.6
  Top Layer w0.6: 40.6,25.6 52,25.6 57.1,30.7 57.1,40.1 56.3,40.9 52,40.9 51.3,40.2 XP5.4
pads on no net: DA1.2 DA1.3 DD1.2 DD1.10 DD1.11 DD1.12 DD1.13 DD1.14 DD1.19 DD1.20 DD1.28 DD1.29 DD1.32 DD1.33 DD1.38 DD1.39 DD1.40 DD1.41 DD1.45 DD1.46 XP5.6 XP6.1 XP6.3 XP6.4 XP6.5 XP6.7 XP6.9 XP6.11 XP6.12 XP6.13 XP6.14 XP6.15 XP6.16 XP6.17 XP6.18 XP6.19 XP6.21 XP6.22 XP6.23 XP6.24 XP6.27 XP6.28 XP6.29 XP6.31 XP6.32 XP6.33 XP6.35 XP6.36 XP6.37 XP6.38 XP6.40

## Polygon pours and split planes (outlines as drawn)
GND on Top Layer "NONET_L-01_P-001" (solid, pour order 0): 4.775,-0.025 73.26,-0.025 ccw(c73.26,2.515) 75.8,2.515 75.8,39.96 ccw(c73.26,39.96) 73.26,42.5 4.75,42.5 ccw(c4.75,39.5) 1.75,39.5 1.75,3 ccw(c4.775,3)

## Silkscreen, mask and mechanical layers (free items; w line width, h text height)
Mechanical 1:
  the board outline again, w0.254